# Altium PCB PCB1.PcbDoc (part 2 of 2)
Units mm, origin at the board's own origin, x right, y up, seen from the top; angles counter-clockwise.
Board outline 103.25 x 34.25 mm, 2 copper layers (Top Layer, Bottom Layer); 292 components, 18 nets, 632 pads, 262 vias.
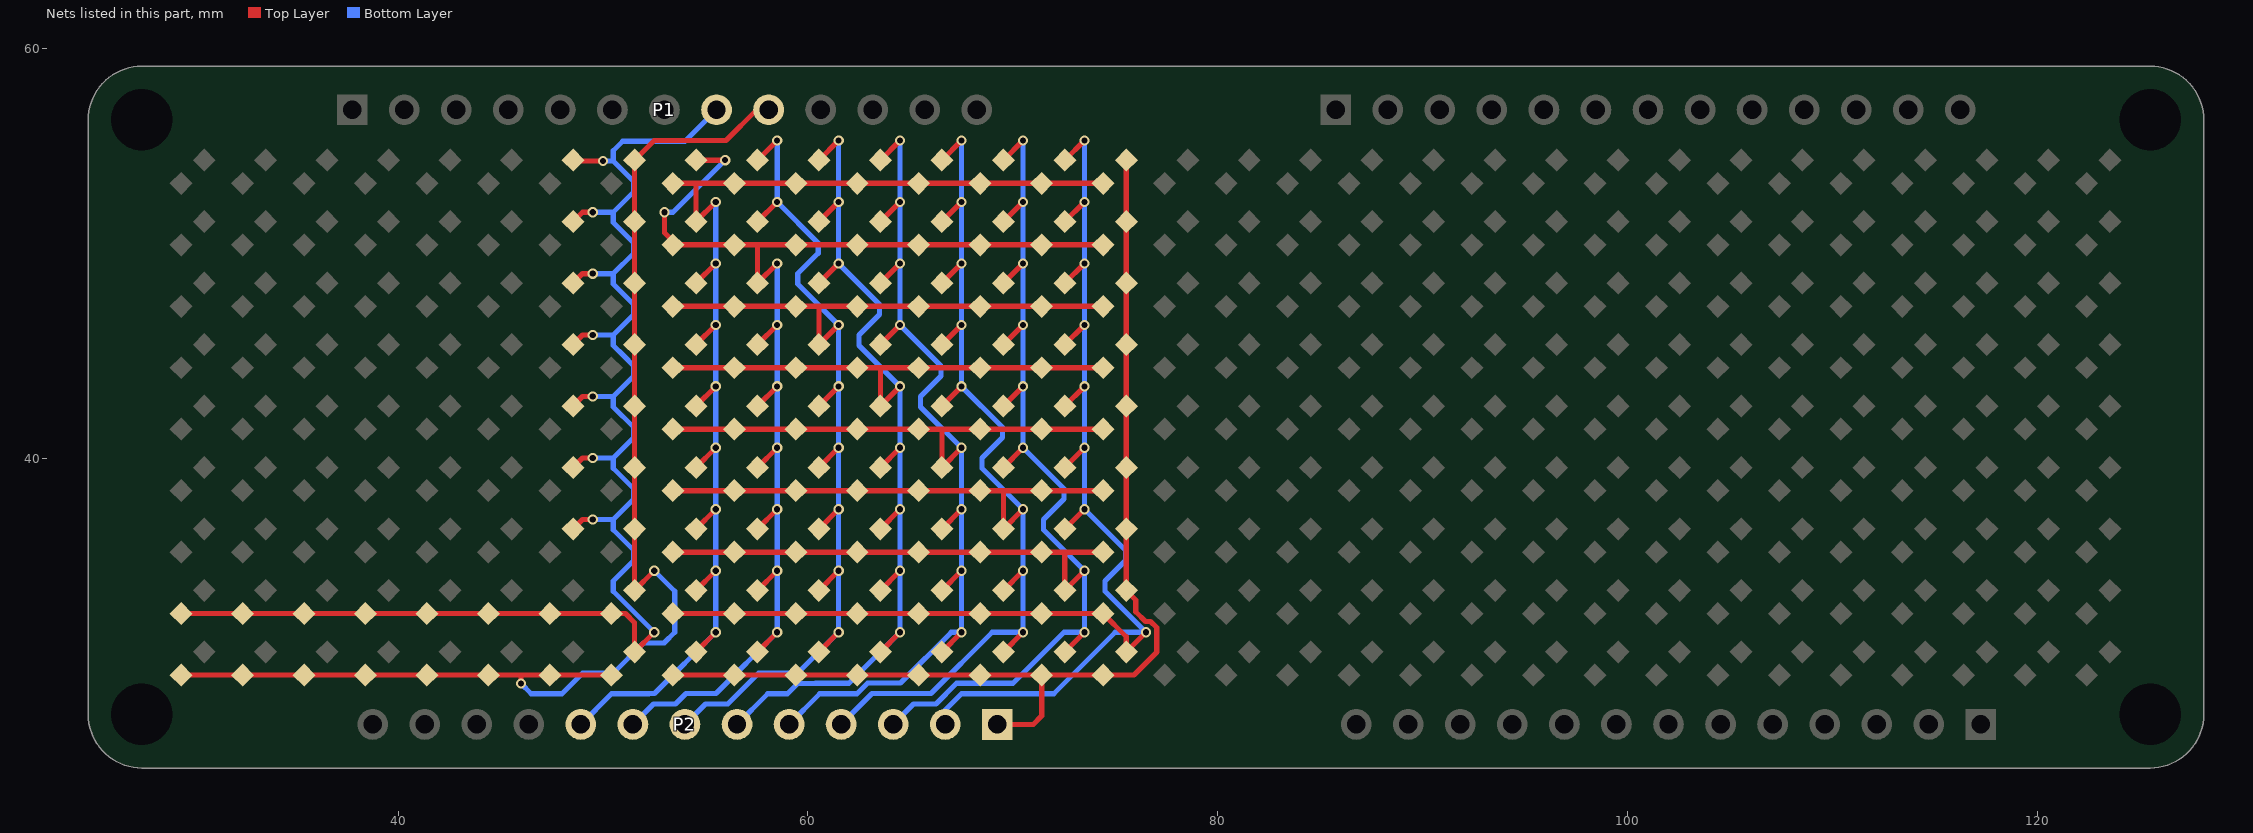
[diagram p2: the nets of this part, all layers, seen from the top]

## Via types
v1: diameter 0.5, hole 0.3, Top Layer to Bottom Layer, 262 vias

## Nets (pads, with @x,y where several pads share a name; then routed paths per layer and width w, separated by ;. In a path a pad name is that pad's centre, name@x,y a point inside that pad or via, vN(x,y) a via of type N, cw(c..) or ccw(c..) an arc to the next point about the centre after c; other vN are vias at no path point) (continued)
CA8: C1-7.1 C2-7.1 C3-7.1 C4-7.1 C5-7.1 C6-7.1 C7-7.1 C8-1.2 C8-2.2 C8-3.2 C8-4.2 C8-5.2 C8-6.2 C8-7.2 C8-8.2 C9-8.1 P1.8 | length 76
  Top Layer w0.254: C8-1.2@29.407,32.407 C8-2.2@32.407,32.407 C8-3.2@35.407,32.407 C8-4.2@38.407,32.407 C8-5.2@41.407,32.407 C8-6.2@44.407,32.407 C8-7.2@47.407,32.407 C8-8.2@50.407,32.407 51.093,32.407 51.539,31.961 C9-8.1@51.539,30.539 v1(52.5,31.5) ; C7-7.1@48.539,36.539 49,37 v1(49.5,37) ; C6-7.1@48.539,39.539 49,40 v1(49.5,40) ; C5-7.1@48.539,42.539 49,43 v1(49.5,43) ; C4-7.1@48.539,45.539 49,46 v1(49.5,46) ; C3-7.1@48.539,48.539 49,49 v1(49.5,49) ; C2-7.1@48.539,51.539 49,52 v1(49.5,52) ; C1-7.1@48.539,54.539 48.578,54.5 v1(50,54.5)
  Bottom Layer w0.254: v1(49.5,37) 50.5,37 ; v1(49.5,40) 50.5,40 ; v1(49.5,43) 50.5,43 ; v1(49.5,46) 50.5,46 ; v1(49.5,49) 50.5,49 ; v1(49.5,52) 50.5,52 ; v1(50,54.5) 50.5,54.5 ; v1(52.5,31.5) 50.5,33.5 50.5,34 51.5,35 51.5,35.5 50.5,36.5 50.5,37 ; P1.8@55.54,57 54.003,55.463 50.963,55.463 50.5,55 50.5,54.5 ; 50.5,37 51.5,38 51.5,38.5 50.5,39.5 50.5,40 ; 50.5,40 51.5,41 51.5,41.5 50.5,42.5 50.5,43 ; 50.5,43 51.5,44 51.5,44.5 51,45 50.5,45.5 50.5,46 ; 50.5,46 51.5,47 51.5,47.5 50.5,48.5 50.5,49 ; 50.5,49 51.5,50 51.5,50.5 50.5,51.5 50.5,52 ; 50.5,52 51.5,53 51.5,53.5 50.5,54.5
CA9: C1-8.1 C2-8.1 C3-8.1 C4-8.1 C5-8.1 C6-8.1 C7-8.1 C8-8.1 C9-1.2 C9-2.2 C9-3.2 C9-4.2 C9-5.2 C9-6.2 C9-7.2 C9-8.2 P1.9 | length 63.7
  Top Layer w0.254: C9-1.2@29.407,29.407 C9-2.2@32.407,29.407 C9-3.2@35.407,29.407 C9-4.2@38.407,29.407 C9-5.2@41.407,29.407 C9-6.2@44.407,29.407 46,29.407 ; v1(46,29) 46,29.407 ; C9-8.2@50.407,29.407 C9-7.2@47.407,29.407 46,29.407 ; v1(52.5,34.5) C8-8.1@51.539,33.539 C7-8.1@51.539,36.539 C6-8.1@51.539,39.539 C5-8.1@51.539,42.539 C4-8.1@51.539,45.539 C3-8.1@51.539,48.539 C2-8.1@51.539,51.539 C1-8.1@51.539,54.539 52.5,55.5 56,55.5 57.5,57 P1.9@58.08,57
  Bottom Layer w0.254: v1(46,29) 46.5,28.5 48,28.5 49,29.5 50.5,29.5 51.971,30.971 53,30.971 53,31 53.5,31.5 53.5,33.5 v1(52.5,34.5)
CB1: C1-9.2 C1-10.2 C1-11.2 C1-12.2 C1-13.2 C1-14.2 C1-15.2 C1-16.2 C2-9.1 C3-9.1 C4-9.1 C5-9.1 C6-9.1 C7-9.1 C8-9.1 C9-9.1 P2.9 | length 63.2
  Top Layer w0.254: C1-9.2@53.407,53.407 54.5,53.407 ; C9-9.1@54.539,30.539 v1(55.5,31.5) ; C8-9.1@54.539,33.539 v1(55.5,34.5) ; C7-9.1@54.539,36.539 v1(55.5,37.5) ; C6-9.1@54.539,39.539 v1(55.5,40.5) ; C5-9.1@54.539,42.539 v1(55.5,43.5) ; C4-9.1@54.539,45.539 v1(55.5,46.5) ; C3-9.1@54.539,48.539 v1(55.5,49.5) ; v1(55.5,52.5) C2-9.1@54.539,51.539 54.539,53.369 54.5,53.407 ; C1-16.2@74.407,53.407 C1-15.2@71.407,53.407 C1-14.2@68.407,53.407 C1-13.2@65.407,53.407 C1-12.2@62.407,53.407 C1-11.2@59.407,53.407 C1-10.2@56.407,53.407 54.5,53.407
  Bottom Layer w0.254: P2.9@48.92,27 50.42,28.5 52.242,28.5 52.25,28.508 52.508,28.508 v1(55.5,31.5) v1(55.5,34.5) v1(55.5,37.5) v1(55.5,40.5) v1(55.5,43.5) v1(55.5,46.5) v1(55.5,49.5) v1(55.5,52.5)
CB2: C1-9.1 C2-9.2 C2-10.2 C2-11.2 C2-12.2 C2-13.2 C2-14.2 C2-15.2 C2-16.2 C3-10.1 C4-10.1 C5-10.1 C6-10.1 C7-10.1 C8-10.1 C9-10.1 P2.8 | length 66.5
  Top Layer w0.254: v1(53,52) 53,51 53.407,50.593 C2-9.2@53.407,50.407 C2-10.2@56.407,50.407 57.5,50.407 ; C1-9.1@54.539,54.539 v1(55.961,54.539) ; C9-10.1@57.539,30.539 v1(58.5,31.5) ; C8-10.1@57.539,33.539 v1(58.5,34.5) ; C7-10.1@57.539,36.539 v1(58.5,37.5) ; C6-10.1@57.539,39.539 v1(58.5,40.5) ; C5-10.1@57.539,42.539 v1(58.5,43.5) ; C4-10.1@57.539,45.539 v1(58.5,46.5) ; v1(58.5,49.5) C3-10.1@57.539,48.539 57.539,50.369 57.5,50.407 ; C2-16.2@74.407,50.407 C2-15.2@71.407,50.407 C2-14.2@68.407,50.407 C2-13.2@65.407,50.407 C2-12.2@62.407,50.407 C2-11.2@59.407,50.407 57.5,50.407
  Bottom Layer w0.254: P2.8@51.46,27 52.46,28 53.545,28 54.053,28.508 55.508,28.508 v1(58.5,31.5) v1(58.5,34.5) v1(58.5,37.5) v1(58.5,40.5) v1(58.5,43.5) v1(58.5,46.5) v1(58.5,49.5) ; v1(53,52) 53.422,52 v1(55.961,54.539)
CB3: C1-10.1 C2-10.1 C3-9.2 C3-10.2 C3-11.2 C3-12.2 C3-13.2 C3-14.2 C3-15.2 C3-16.2 C4-11.1 C5-11.1 C6-11.1 C7-11.1 C8-11.1 C9-11.1 P2.7 | length 69.2
  Top Layer w0.254: C3-9.2@53.407,47.407 C3-10.2@56.407,47.407 C3-11.2@59.407,47.407 60.5,47.407 ; C2-10.1@57.539,51.539 v1(58.5,52.5) ; C1-10.1@57.539,54.539 v1(58.5,55.5) ; C9-11.1@60.539,30.539 v1(61.5,31.5) ; C8-11.1@60.539,33.539 v1(61.5,34.5) ; C7-11.1@60.539,36.539 v1(61.5,37.5) ; C6-11.1@60.539,39.539 v1(61.5,40.5) ; C5-11.1@60.539,42.539 v1(61.5,43.5) ; v1(61.5,46.5) C4-11.1@60.539,45.539 60.539,47.369 60.5,47.407 ; C3-16.2@74.407,47.407 C3-15.2@71.407,47.407 C3-14.2@68.407,47.407 C3-13.2@65.407,47.407 C3-12.2@62.407,47.407 60.5,47.407
  Bottom Layer w0.254: P2.7@54,27 55,28 56.085,28 57.585,29.5 59.282,29.5 59.29,29.508 59.508,29.508 v1(61.5,31.5) v1(61.5,34.5) v1(61.5,37.5) v1(61.5,40.5) v1(61.5,43.5) v1(61.5,46.5) 59.5,48.5 59.5,49 60.5,50 60.5,50.5 v1(58.5,52.5) v1(58.5,55.5)
CB4: C1-11.1 C2-11.1 C3-11.1 C4-9.2 C4-10.2 C4-11.2 C4-12.2 C4-13.2 C4-14.2 C4-15.2 C4-16.2 C5-12.1 C6-12.1 C7-12.1 C8-12.1 C9-12.1 P2.6 | length 69.7
  Top Layer w0.254: C4-9.2@53.407,44.407 C4-10.2@56.407,44.407 C4-11.2@59.407,44.407 C4-12.2@62.407,44.407 63.5,44.407 ; C3-11.1@60.539,48.539 v1(61.5,49.5) ; C2-11.1@60.539,51.539 v1(61.5,52.5) ; C1-11.1@60.539,54.539 v1(61.5,55.5) ; C9-12.1@63.539,30.539 v1(64.5,31.5) ; C8-12.1@63.539,33.539 v1(64.5,34.5) ; C7-12.1@63.539,36.539 v1(64.5,37.5) ; C6-12.1@63.539,39.539 v1(64.5,40.5) ; v1(64.5,43.5) C5-12.1@63.539,42.539 63.539,44.369 63.5,44.407 ; C4-16.2@74.407,44.407 C4-15.2@71.407,44.407 C4-14.2@68.407,44.407 C4-13.2@65.407,44.407 63.5,44.407
  Bottom Layer w0.254: P2.6@56.54,27 58.04,28.5 59,28.5 59.5,29 60.362,29 60.37,29.008 62.008,29.008 v1(64.5,31.5) v1(64.5,34.5) v1(64.5,37.5) v1(64.5,40.5) v1(64.5,43.5) 62.5,45.5 62.5,46 63.5,47 63.5,47.5 v1(61.5,49.5) v1(61.5,52.5) v1(61.5,55.5)
CB5: C1-12.1 C2-12.1 C3-12.1 C4-12.1 C5-9.2 C5-10.2 C5-11.2 C5-12.2 C5-13.2 C5-14.2 C5-15.2 C5-16.2 C6-13.1 C7-13.1 C8-13.1 C9-13.1 P2.5 | length 70.1
  Top Layer w0.254: C5-9.2@53.407,41.407 C5-10.2@56.407,41.407 C5-11.2@59.407,41.407 C5-12.2@62.407,41.407 C5-13.2@65.407,41.407 66.5,41.407 ; C4-12.1@63.539,45.539 v1(64.5,46.5) ; C3-12.1@63.539,48.539 v1(64.5,49.5) ; C2-12.1@63.539,51.539 v1(64.5,52.5) ; C1-12.1@63.539,54.539 v1(64.5,55.5) ; C9-13.1@66.539,30.539 v1(67.5,31.5) ; C8-13.1@66.539,33.539 v1(67.5,34.5) ; C7-13.1@66.539,36.539 v1(67.5,37.5) ; v1(67.5,40.5) C6-13.1@66.539,39.539 66.539,41.369 66.5,41.407 ; C5-16.2@74.407,41.407 C5-15.2@71.407,41.407 C5-14.2@68.407,41.407 66.5,41.407
  Bottom Layer w0.254: P2.5@59.08,27 60.58,28.5 62.402,28.5 62.918,29.016 64.516,29.016 67,31.5 v1(67.5,31.5) v1(67.5,34.5) v1(67.5,37.5) v1(67.5,40.5) 65.5,42.5 65.5,43 66.5,44 66.5,44.5 v1(64.5,46.5) v1(64.5,49.5) v1(64.5,52.5) v1(64.5,55.5)
CB6: C1-13.1 C2-13.1 C3-13.1 C4-13.1 C5-13.1 C6-9.2 C6-10.2 C6-11.2 C6-12.2 C6-13.2 C6-14.2 C6-15.2 C6-16.2 C7-14.1 C8-14.1 C9-14.1 P2.4 | length 70.6
  Top Layer w0.254: C6-9.2@53.407,38.407 C6-10.2@56.407,38.407 C6-11.2@59.407,38.407 C6-12.2@62.407,38.407 C6-13.2@65.407,38.407 C6-14.2@68.407,38.407 69.5,38.407 ; C5-13.1@66.539,42.539 v1(67.5,43.5) ; C4-13.1@66.539,45.539 v1(67.5,46.5) ; C3-13.1@66.539,48.539 v1(67.5,49.5) ; C2-13.1@66.539,51.539 v1(67.5,52.5) ; C1-13.1@66.539,54.539 v1(67.5,55.5) ; C9-14.1@69.539,30.539 v1(70.5,31.5) ; C8-14.1@69.539,33.539 v1(70.5,34.5) ; v1(70.5,37.5) C7-14.1@69.539,36.539 69.539,38.369 69.5,38.407 ; C6-16.2@74.407,38.407 C6-15.2@71.407,38.407 69.5,38.407
  Bottom Layer w0.254: P2.4@61.62,27 63.128,28.508 66.008,28.508 69,31.5 v1(70.5,31.5) v1(70.5,34.5) v1(70.5,37.5) 68.5,39.5 68.5,40 69.5,41 69.5,41.5 v1(67.5,43.5) v1(67.5,46.5) v1(67.5,49.5) v1(67.5,52.5) v1(67.5,55.5)
CB7: C1-14.1 C2-14.1 C3-14.1 C4-14.1 C5-14.1 C6-14.1 C7-9.2 C7-10.2 C7-11.2 C7-12.2 C7-13.2 C7-14.2 C7-15.2 C7-16.2 C8-15.1 C9-15.1 P2.3 | length 71
  Top Layer w0.254: C7-9.2@53.407,35.407 C7-10.2@56.407,35.407 C7-11.2@59.407,35.407 C7-12.2@62.407,35.407 C7-13.2@65.407,35.407 C7-14.2@68.407,35.407 C7-15.2@71.407,35.407 72.5,35.407 ; C6-14.1@69.539,39.539 v1(70.5,40.5) ; C5-14.1@69.539,42.539 v1(70.5,43.5) ; C4-14.1@69.539,45.539 v1(70.5,46.5) ; C3-14.1@69.539,48.539 v1(70.5,49.5) ; C2-14.1@69.539,51.539 v1(70.5,52.5) ; C1-14.1@69.539,54.539 v1(70.5,55.5) ; C9-15.1@72.539,30.539 v1(73.5,31.5) ; v1(73.5,34.5) C8-15.1@72.539,33.539 72.539,35.369 72.5,35.407 ; C7-16.2@74.407,35.407 72.5,35.407
  Bottom Layer w0.254: P2.3@64.16,27 65.16,28 66.245,28 67.253,29.008 70.008,29.008 72.5,31.5 v1(73.5,31.5) v1(73.5,34.5) 71.5,36.5 71.5,37 72.5,38 72.5,38.5 v1(70.5,40.5) v1(70.5,43.5) v1(70.5,46.5) v1(70.5,49.5) v1(70.5,52.5) v1(70.5,55.5)
CB8: C1-15.1 C2-15.1 C3-15.1 C4-15.1 C5-15.1 C6-15.1 C7-15.1 C8-9.2 C8-10.2 C8-11.2 C8-12.2 C8-13.2 C8-14.2 C8-15.2 C8-16.2 C9-16.1 P2.2 | length 72.4
  Top Layer w0.254: C8-9.2@53.407,32.407 C8-10.2@56.407,32.407 C8-11.2@59.407,32.407 C8-12.2@62.407,32.407 C8-13.2@65.407,32.407 C8-14.2@68.407,32.407 C8-15.2@71.407,32.407 C8-16.2@74.407,32.407 75.539,31.276 C9-16.1@75.539,30.539 v1(76.5,31.5) ; C7-15.1@72.539,36.539 v1(73.5,37.5) ; C6-15.1@72.539,39.539 v1(73.5,40.5) ; C5-15.1@72.539,42.539 v1(73.5,43.5) ; C4-15.1@72.539,45.539 v1(73.5,46.5) ; C3-15.1@72.539,48.539 v1(73.5,49.5) ; C2-15.1@72.539,51.539 v1(73.5,52.5) ; C1-15.1@72.539,54.539 v1(73.5,55.5)
  Bottom Layer w0.254: P2.2@66.7,27 66.7,27.7 67.5,28.5 72,28.5 75,31.5 v1(76.5,31.5) 74.5,33.5 74.5,34 75.5,35 75.5,35.5 v1(73.5,37.5) v1(73.5,40.5) v1(73.5,43.5) v1(73.5,46.5) v1(73.5,49.5) v1(73.5,52.5) v1(73.5,55.5)
CB9: C1-16.1 C2-16.1 C3-16.1 C4-16.1 C5-16.1 C6-16.1 C7-16.1 C8-16.1 C9-9.2 C9-10.2 C9-11.2 C9-12.2 C9-13.2 C9-14.2 C9-15.2 C9-16.2 P2.1 | length 53.2
  Top Layer w0.254: C9-9.2@53.407,29.407 C9-10.2@56.407,29.407 C9-11.2@59.407,29.407 C9-12.2@62.407,29.407 C9-13.2@65.407,29.407 C9-14.2@68.407,29.407 C9-15.2@71.407,29.407 ; P2.1@69.24,27 71,27 71.407,27.407 C9-15.2@71.407,29.407 ; C1-16.1@75.539,54.539 C3-16.1@75.539,48.539 C4-16.1@75.539,45.539 C5-16.1@75.539,42.539 C6-16.1@75.539,39.539 C7-16.1@75.539,36.539 C8-16.1@75.539,33.539 76,33.078 76,32.5 76.471,32.029 76.719,32.029 77.029,31.719 77.029,30.529 75.907,29.407 C9-16.2@74.407,29.407 C9-15.2@71.407,29.407
pads on no net: C1-1_1.1 C1-1_1.2 C1-2_1.1 C1-2_1.2 C1-3_1.1 C1-3_1.2 C1-4_1.1 C1-4_1.2 C1-5_1.1 C1-5_1.2 C1-6_1.1 C1-6_1.2 C1-7_1.1 C1-7_1.2 C1-8_1.1 C1-8_1.2 C1-9_1.1 C1-9_1.2 C1-10_1.1 C1-10_1.2 C1-11_1.1 C1-11_1.2 C1-12_1.1 C1-12_1.2 C1-13_1.1 C1-13_1.2 C1-14_1.1 C1-14_1.2 C1-15_1.1 C1-15_1.2 C1-16_1.1 C1-16_1.2 C2-1_1.1 C2-1_1.2 C2-2_1.1 C2-2_1.2 C2-3_1.1 C2-3_1.2 C2-4_1.1 C2-4_1.2 C2-5_1.1 C2-5_1.2 C2-6_1.1 C2-6_1.2 C2-7_1.1 C2-7_1.2 C2-8_1.1 C2-8_1.2 C2-9_1.1 C2-9_1.2 C2-10_1.1 C2-10_1.2 C2-11_1.1 C2-11_1.2 C2-12_1.1 C2-12_1.2 C2-13_1.1 C2-13_1.2 C2-14_1.1 C2-14_1.2 C2-15_1.1 C2-15_1.2 C2-16_1.1 C2-16_1.2 C3-1_1.1 C3-1_1.2 C3-2_1.1 C3-2_1.2 C3-3_1.1 C3-3_1.2 C3-4_1.1 C3-4_1.2 C3-5_1.1 C3-5_1.2 C3-6_1.1 C3-6_1.2 C3-7_1.1 C3-7_1.2 C3-8_1.1 C3-8_1.2 C3-9_1.1 C3-9_1.2 C3-10_1.1 C3-10_1.2 C3-11_1.1 C3-11_1.2 C3-12_1.1 C3-12_1.2 C3-13_1.1 C3-13_1.2 C3-14_1.1 C3-14_1.2 C3-15_1.1 C3-15_1.2 C3-16_1.1 C3-16_1.2 C4-1_1.1 C4-1_1.2 C4-2_1.1 C4-2_1.2 C4-3_1.1 C4-3_1.2 C4-4_1.1 C4-4_1.2 C4-5_1.1 C4-5_1.2 C4-6_1.1 C4-6_1.2 C4-7_1.1 C4-7_1.2 C4-8_1.1 C4-8_1.2 C4-9_1.1 C4-9_1.2 C4-10_1.1 C4-10_1.2 C4-11_1.1 C4-11_1.2 C4-12_1.1 C4-12_1.2 C4-13_1.1 C4-13_1.2 C4-14_1.1 C4-14_1.2 C4-15_1.1 C4-15_1.2 C4-16_1.1 C4-16_1.2 C5-1_1.1 C5-1_1.2 C5-2_1.1 C5-2_1.2 C5-3_1.1 C5-3_1.2 C5-4_1.1 C5-4_1.2 C5-5_1.1 C5-5_1.2 C5-6_1.1 C5-6_1.2 C5-7_1.1 C5-7_1.2 C5-8_1.1 C5-8_1.2 C5-9_1.1 C5-9_1.2 C5-10_1.1 C5-10_1.2 C5-11_1.1 C5-11_1.2 C5-12_1.1 C5-12_1.2 C5-13_1.1 C5-13_1.2 C5-14_1.1 C5-14_1.2 C5-15_1.1 C5-15_1.2 C5-16_1.1 C5-16_1.2 C6-1_1.1 C6-1_1.2 C6-2_1.1 C6-2_1.2 C6-3_1.1 C6-3_1.2 C6-4_1.1 C6-4_1.2 C6-5_1.1 C6-5_1.2 C6-6_1.1 C6-6_1.2 C6-7_1.1 C6-7_1.2 C6-8_1.1 C6-8_1.2 C6-9_1.1 C6-9_1.2 C6-10_1.1 C6-10_1.2 C6-11_1.1 C6-11_1.2 C6-12_1.1 C6-12_1.2 C6-13_1.1 C6-13_1.2 C6-14_1.1 C6-14_1.2 C6-15_1.1 C6-15_1.2 C6-16_1.1 C6-16_1.2 C7-1_1.1 C7-1_1.2 C7-2_1.1 C7-2_1.2 C7-3_1.1 C7-3_1.2 C7-4_1.1 C7-4_1.2 C7-5_1.1 C7-5_1.2 C7-6_1.1 C7-6_1.2 C7-7_1.1 C7-7_1.2 C7-8_1.1 C7-8_1.2 C7-9_1.1 C7-9_1.2 C7-10_1.1 C7-10_1.2 C7-11_1.1 C7-11_1.2 C7-12_1.1 C7-12_1.2 C7-13_1.1 C7-13_1.2 C7-14_1.1 C7-14_1.2 C7-15_1.1 C7-15_1.2 C7-16_1.1 C7-16_1.2 C8-1_1.1 C8-1_1.2 C8-2_1.1 C8-2_1.2 C8-3_1.1 C8-3_1.2 C8-4_1.1 C8-4_1.2 C8-5_1.1 C8-5_1.2 C8-6_1.1 C8-6_1.2 C8-7_1.1 C8-7_1.2 C8-8_1.1 C8-8_1.2 C8-9_1.1 C8-9_1.2 C8-10_1.1 C8-10_1.2 C8-11_1.1 C8-11_1.2 C8-12_1.1 C8-12_1.2 C8-13_1.1 C8-13_1.2 C8-14_1.1 C8-14_1.2 C8-15_1.1 C8-15_1.2 C8-16_1.1 C8-16_1.2 C9-1_1.1 C9-1_1.2 C9-2_1.1 C9-2_1.2 C9-3_1.1 C9-3_1.2 C9-4_1.1 C9-4_1.2 C9-5_1.1 C9-5_1.2 C9-6_1.1 C9-6_1.2 C9-7_1.1 C9-7_1.2 C9-8_1.1 C9-8_1.2 C9-9_1.1 C9-9_1.2 C9-10_1.1 C9-10_1.2 C9-11_1.1 C9-11_1.2 C9-12_1.1 C9-12_1.2 C9-13_1.1 C9-13_1.2 C9-14_1.1 C9-14_1.2 C9-15_1.1 C9-15_1.2 C9-16_1.1 C9-16_1.2 P1.10 P1.11 P1.12 P1.13 P1_1.1 P1_1.2 P1_1.3 P1_1.4 P1_1.5 P1_1.6 P1_1.7 P1_1.8 P1_1.9 P1_1.10 P1_1.11 P1_1.12 P1_1.13 P2.10 P2.11 P2.12 P2.13 P2_1.1 P2_1.2 P2_1.3 P2_1.4 P2_1.5 P2_1.6 P2_1.7 P2_1.8 P2_1.9 P2_1.10 P2_1.11 P2_1.12 P2_1.13
copper on no net: | length 1239
  Top Layer w0.254: 77.407,29.407 80.407,29.407 83.407,29.407 86.407,29.407 89.407,29.407 92.407,29.407 94,29.407 ; 77.407,32.407 80.407,32.407 83.407,32.407 86.407,32.407 89.407,32.407 92.407,32.407 95.407,32.407 98.407,32.407 99.093,32.407 99.539,31.961 99.539,30.539 v1(100.5,31.5) ; 77.407,35.407 80.407,35.407 83.407,35.407 86.407,35.407 89.407,35.407 92.407,35.407 95.407,35.407 96.5,35.407 ; 77.407,38.407 80.407,38.407 83.407,38.407 86.407,38.407 89.407,38.407 92.407,38.407 93.5,38.407 ; 77.407,41.407 80.407,41.407 83.407,41.407 86.407,41.407 89.407,41.407 90.5,41.407 ; 77.407,44.407 80.407,44.407 83.407,44.407 86.407,44.407 87.5,44.407 ; 77.407,47.407 80.407,47.407 83.407,47.407 84.5,47.407 ; 77.407,50.407 80.407,50.407 81.5,50.407 ; 77.407,53.407 78.5,53.407 ; 78.539,30.539 v1(79.5,31.5) ; 78.539,33.539 v1(79.5,34.5) ; 78.539,36.539 v1(79.5,37.5) ; 78.539,39.539 v1(79.5,40.5) ; 78.539,42.539 v1(79.5,43.5) ; 78.539,45.539 v1(79.5,46.5) ; 78.539,48.539 v1(79.5,49.5) ; 78.539,54.539 80,56 v1(82,56) ; v1(79.5,52.5) 78.539,51.539 78.539,53.369 78.5,53.407 ; 81.539,30.539 v1(82.5,31.5) ; 81.539,33.539 v1(82.5,34.5) ; 81.539,36.539 v1(82.5,37.5) ; 81.539,39.539 v1(82.5,40.5) ; 81.539,42.539 v1(82.5,43.5) ; 81.539,45.539 v1(82.5,46.5) ; 81.539,51.539 82,52 v1(82.5,52) ; 81.539,54.539 82,55 v1(82.5,55) ; v1(82.5,49.5) 81.539,48.539 81.5,48.578 81.5,50.407 ; 84.539,30.539 v1(85.5,31.5) ; 84.539,33.539 v1(85.5,34.5) ; 84.539,36.539 v1(85.5,37.5) ; 84.539,39.539 v1(85.5,40.5) ; 84.539,42.539 v1(85.5,43.5) ; 84.539,48.539 85,49 v1(85.5,49) ; 84.539,51.539 85,52 v1(85.5,52) ; 84.539,54.539 84.578,54.5 v1(86.125,54.5) ; v1(85.5,46.5) 84.539,45.539 84.539,47.369 84.5,47.407 ; 87.539,30.539 v1(88.5,31.5) ; 87.539,33.539 v1(88.5,34.5) ; 87.539,36.539 v1(88.5,37.5) ; 87.539,39.539 v1(88.5,40.5) ; 87.539,45.539 88.039,45.539 v1(88.5,46) ; 87.539,48.539 88,49 v1(88.5,49) ; 87.539,51.539 88.039,51.539 v1(88.5,52) ; 87.539,54.539 87.578,54.5 v1(89,54.5) ; v1(88.5,43.5) 87.539,42.539 87.539,44.369 87.5,44.407 ; 90.539,30.539 v1(91.5,31.5) ; 90.539,33.539 v1(91.5,34.5) ; 90.539,36.539 v1(91.5,37.5) ; 90.539,42.539 91,43 v1(91.5,43) ; 90.539,45.539 91,46 v1(91.5,46) ; 90.539,48.539 91,49 v1(91.5,49) ; 90.539,51.539 91,52 v1(91.5,52) ; 90.539,54.539 90.578,54.5 v1(92,54.5) ; v1(91.5,40.5) 90.539,39.539 90.539,41.369 90.5,41.407 ; 93.539,30.539 v1(94.5,31.5) ; 93.539,33.539 v1(94.5,34.5) ; 93.539,39.539 94,40 v1(94.5,40) ; 93.539,42.539 94,43 v1(94.5,43) ; 93.539,45.539 94,46 v1(94.5,46) ; 93.539,48.539 94,49 v1(94.5,49) ; 93.539,51.539 94,52 v1(94.5,52) ; 93.539,54.539 93.578,54.5 v1(95,54.5) ; v1(94,29) 94,29.407 ; v1(94.5,37.5) 93.539,36.539 93.539,38.369 93.5,38.407 ; 96.539,30.539 v1(97.5,31.5) ; 96.539,36.539 97,37 v1(97.5,37) ; 96.539,39.539 97,40 v1(97.5,40) ; 96.539,42.539 97,43 v1(97.5,43) ; 96.539,45.539 97,46 v1(97.5,46) ; 96.539,48.539 97,49 v1(97.5,49) ; 96.539,51.539 97,52 v1(97.5,52) ; 96.539,54.539 96.578,54.5 v1(98,54.5) ; v1(97.5,34.5) 96.539,33.539 96.539,35.369 96.5,35.407 ; 98.407,29.407 95.407,29.407 94,29.407 ; 98.407,35.407 96.5,35.407 ; 98.407,38.407 95.407,38.407 93.5,38.407 ; 98.407,41.407 95.407,41.407 92.407,41.407 90.5,41.407 ; 98.407,44.407 95.407,44.407 92.407,44.407 89.407,44.407 87.5,44.407 ; 98.407,47.407 95.407,47.407 92.407,47.407 89.407,47.407 86.407,47.407 84.5,47.407 ; 98.407,53.407 95.407,53.407 92.407,53.407 89.407,53.407 86.407,53.407 83.407,53.407 80.407,53.407 78.5,53.407 ; 98.5,50.5 98.407,50.407 95.407,50.407 92.407,50.407 89.407,50.407 86.407,50.407 83.407,50.407 81.5,50.407 ; v1(100.5,34.5) 99.539,33.539 99.539,36.539 99.539,39.539 99.539,42.539 99.539,45.539 99.539,48.539 99.539,51.539 99.539,54.539 100.5,55.5 104,55.5 105.5,57 106.08,57 ; v1(101,52) 101,51 101.407,50.593 101.407,50.407 104.407,50.407 105.5,50.407 ; 101.407,29.407 104.407,29.407 107.407,29.407 110.407,29.407 113.407,29.407 116.407,29.407 119.407,29.407 ; 101.407,32.407 104.407,32.407 107.407,32.407 110.407,32.407 113.407,32.407 116.407,32.407 119.407,32.407 122.407,32.407 123.539,31.276 123.539,30.539 v1(124.5,31.5) ; 101.407,35.407 104.407,35.407 107.407,35.407 110.407,35.407 113.407,35.407 116.407,35.407 119.407,35.407 120.5,35.407 ; 101.407,38.407 104.407,38.407 107.407,38.407 110.407,38.407 113.407,38.407 116.407,38.407 117.5,38.407 ; 101.407,41.407 104.407,41.407 107.407,41.407 110.407,41.407 113.407,41.407 114.5,41.407 ; 101.407,44.407 104.407,44.407 107.407,44.407 110.407,44.407 111.5,44.407 ; 101.407,47.407 104.407,47.407 107.407,47.407 108.5,47.407 ; 101.407,53.407 102.5,53.407 ; 102.539,30.539 v1(103.5,31.5) ; 102.539,33.539 v1(103.5,34.5) ; 102.539,36.539 v1(103.5,37.5) ; 102.539,39.539 v1(103.5,40.5) ; 102.539,42.539 v1(103.5,43.5) ; 102.539,45.539 v1(103.5,46.5) ; 102.539,48.539 v1(103.5,49.5) ; 102.539,54.539 v1(103.961,54.539) ; v1(103.5,52.5) 102.539,51.539 102.539,53.369 102.5,53.407 ; 105.539,30.539 v1(106.5,31.5) ; 105.539,33.539 v1(106.5,34.5) ; 105.539,36.539 v1(106.5,37.5) ; 105.539,39.539 v1(106.5,40.5) ; 105.539,42.539 v1(106.5,43.5) ; 105.539,45.539 v1(106.5,46.5) ; 105.539,51.539 v1(106.5,52.5) ; 105.539,54.539 v1(106.5,55.5) ; v1(106.5,49.5) 105.539,48.539 105.539,50.369 105.5,50.407 ; 108.539,30.539 v1(109.5,31.5) ; 108.539,33.539 v1(109.5,34.5) ; 108.539,36.539 v1(109.5,37.5) ; 108.539,39.539 v1(109.5,40.5) ; 108.539,42.539 v1(109.5,43.5) ; 108.539,48.539 v1(109.5,49.5) ; 108.539,51.539 v1(109.5,52.5) ; 108.539,54.539 v1(109.5,55.5) ; v1(109.5,46.5) 108.539,45.539 108.539,47.369 108.5,47.407 ; 111.539,30.539 v1(112.5,31.5) ; 111.539,33.539 v1(112.5,34.5) ; 111.539,36.539 v1(112.5,37.5) ; 111.539,39.539 v1(112.5,40.5) ; 111.539,45.539 v1(112.5,46.5) ; 111.539,48.539 v1(112.5,49.5) ; 111.539,51.539 v1(112.5,52.5) ; 111.539,54.539 v1(112.5,55.5) ; v1(112.5,43.5) 111.539,42.539 111.539,44.369 111.5,44.407 ; 114.539,30.539 v1(115.5,31.5) ; 114.539,33.539 v1(115.5,34.5) ; 114.539,36.539 v1(115.5,37.5) ; 114.539,42.539 v1(115.5,43.5) ; 114.539,45.539 v1(115.5,46.5) ; 114.539,48.539 v1(115.5,49.5) ; 114.539,51.539 v1(115.5,52.5) ; 114.539,54.539 v1(115.5,55.5) ; v1(115.5,40.5) 114.539,39.539 114.539,41.369 114.5,41.407 ; 117.24,27 119,27 119.407,27.407 119.407,29.407 ; 117.539,30.539 v1(118.5,31.5) ; 117.539,33.539 v1(118.5,34.5) ; 117.539,39.539 v1(118.5,40.5) ; 117.539,42.539 v1(118.5,43.5) ; 117.539,45.539 v1(118.5,46.5) ; 117.539,48.539 v1(118.5,49.5) ; 117.539,51.539 v1(118.5,52.5) ; 117.539,54.539 v1(118.5,55.5) ; v1(118.5,37.5) 117.539,36.539 117.539,38.369 117.5,38.407 ; 120.539,30.539 v1(121.5,31.5) ; 120.539,36.539 v1(121.5,37.5) ; 120.539,39.539 v1(121.5,40.5) ; 120.539,42.539 v1(121.5,43.5) ; 120.539,45.539 v1(121.5,46.5) ; 120.539,48.539 v1(121.5,49.5) ; 120.539,51.539 v1(121.5,52.5) ; 120.539,54.539 v1(121.5,55.5) ; v1(121.5,34.5) 120.539,33.539 120.539,35.369 120.5,35.407 ; 122.407,35.407 120.5,35.407 ; 122.407,38.407 119.407,38.407 117.5,38.407 ; 122.407,41.407 119.407,41.407 116.407,41.407 114.5,41.407 ; 122.407,44.407 119.407,44.407 116.407,44.407 113.407,44.407 111.5,44.407 ; 122.407,47.407 119.407,47.407 116.407,47.407 113.407,47.407 110.407,47.407 108.5,47.407 ; 122.407,50.407 119.407,50.407 116.407,50.407 113.407,50.407 110.407,50.407 107.407,50.407 105.5,50.407 ; 122.407,53.407 119.407,53.407 116.407,53.407 113.407,53.407 110.407,53.407 107.407,53.407 104.407,53.407 102.5,53.407 ; 123.539,54.539 123.539,48.539 123.539,45.539 123.539,42.539 123.539,39.539 123.539,36.539 123.539,33.539 124,33.078 124,32.5 124.471,32.029 124.719,32.029 125.029,31.719 125.029,30.529 123.907,29.407 122.407,29.407 119.407,29.407
  Bottom Layer w0.254: v1(79.5,31.5) v1(79.5,34.5) v1(79.5,37.5) v1(79.5,40.5) v1(79.5,43.5) v1(79.5,46.5) v1(79.5,49.5) v1(79.5,52.5) 79.5,55 81.5,57 85.76,57 ; v1(82.5,31.5) v1(82.5,34.5) v1(82.5,37.5) v1(82.5,40.5) v1(82.5,43.5) v1(82.5,46.5) v1(82.5,49.5) 80.5,51.5 80.5,52 81.5,53 81.5,53.5 80.5,54.5 80.5,55.282 81.189,55.971 87.271,55.971 88.3,57 ; v1(82.5,52) 83.5,52 ; v1(82.5,55) 82.85,55 83.1,55.25 ; v1(85.5,31.5) v1(85.5,34.5) v1(85.5,37.5) v1(85.5,40.5) v1(85.5,43.5) v1(85.5,46.5) 83.5,48.5 83.5,49 84.5,50 84.5,50.5 83.5,51.5 83.5,52 ; v1(85.5,49) 86.5,49 ; v1(85.5,52) 86.5,52 ; v1(86.125,54.5) 86.35,54.725 ; v1(88.5,31.5) v1(88.5,34.5) v1(88.5,37.5) v1(88.5,40.5) v1(88.5,43.5) 86.5,45.5 86.5,46 87.5,47 87.5,47.5 86.5,48.5 86.5,49 ; v1(88.5,46) 89.5,46 ; v1(88.5,49) 89.5,49 ; v1(88.5,52) 89.5,52 ; v1(89,54.5) 89.5,54.5 ; 90.84,57 89.715,55.875 87.893,55.875 87.481,55.463 83.313,55.463 83.1,55.25 ; v1(91.5,31.5) v1(91.5,34.5) v1(91.5,37.5) v1(91.5,40.5) 89.5,42.5 89.5,43 90.5,44 90.5,44.5 89.5,45.5 89.5,46 ; v1(91.5,43) 92.5,43 ; v1(91.5,46) 92.5,46 ; v1(91.5,49) 92.5,49 ; v1(91.5,52) 92.5,52 ; v1(92,54.5) 92.04,54.46 92.46,54.46 93.421,53.5 93.421,53.079 92.5,52.158 92.5,52 ; 92.21,54.71 92.21,54.992 93.71,54.992 94.718,56 95.465,56 95.494,55.971 97.431,55.971 98.46,57 ; 93.38,57 92.5,57 90.867,55.367 88.367,55.367 87.955,54.955 86.58,54.955 86.35,54.725 ; v1(94,29) 94.5,28.5 96,28.5 97,29.5 98.5,29.5 99.971,30.971 101,30.971 101,31 101.5,31.5 101.5,33.5 v1(100.5,34.5) ; v1(94.5,31.5) v1(94.5,34.5) v1(94.5,37.5) 92.5,39.5 92.5,40 93.5,41 93.5,41.5 92.5,42.5 92.5,43 ; v1(94.5,40) 95.5,40 ; v1(94.5,43) 95.5,43 ; v1(94.5,46) 95.5,46 ; v1(94.5,49) 95.5,49 ; v1(94.5,52) 95.5,52 ; v1(95,54.5) 95.5,54.5 ; 95.92,57 95,57 93.5,55.5 92,55.5 91.25,54.75 90,54.75 89.891,54.859 89.609,54.859 89.5,54.75 89.5,54.5 ; 96.92,27 98.42,28.5 100.242,28.5 100.25,28.508 100.508,28.508 v1(103.5,31.5) v1(103.5,34.5) v1(103.5,37.5) v1(103.5,40.5) v1(103.5,43.5) v1(103.5,46.5) v1(103.5,49.5) v1(103.5,52.5) ; v1(97.5,31.5) v1(97.5,34.5) 95.5,36.5 95.5,37 96.5,38 96.5,38.5 95.5,39.5 95.5,40 ; v1(97.5,37) 98.5,37 ; v1(97.5,40) 98.5,40 ; v1(97.5,43) 98.5,43 ; v1(97.5,46) 98.5,46 ; v1(97.5,49) 98.5,49 ; v1(97.5,52) 98.5,52 ; v1(98,54.5) 98.5,54.5 ; 99.46,27 100.46,28 101.545,28 102.053,28.508 103.508,28.508 v1(106.5,31.5) v1(106.5,34.5) v1(106.5,37.5) v1(106.5,40.5) v1(106.5,43.5) v1(106.5,46.5) v1(106.5,49.5) ; v1(100.5,31.5) 98.5,33.5 98.5,34 99.5,35 99.5,35.5 98.5,36.5 98.5,37 ; v1(101,52) 101.422,52 v1(103.961,54.539) ; 101,57 99.971,55.971 98.471,55.971 97.5,55 95.5,55 95.5,54.5 ; 102,27 103,28 104.085,28 105.585,29.5 107.282,29.5 107.29,29.508 107.508,29.508 v1(109.5,31.5) v1(109.5,34.5) v1(109.5,37.5) v1(109.5,40.5) v1(109.5,43.5) v1(109.5,46.5) 107.5,48.5 107.5,49 108.5,50 108.5,50.5 v1(106.5,52.5) v1(106.5,55.5) ; 103.54,57 102.003,55.463 98.963,55.463 98.5,55 98.5,54.5 ; 104.54,27 106.04,28.5 107,28.5 107.5,29 108.362,29 108.37,29.008 110.008,29.008 v1(112.5,31.5) v1(112.5,34.5) v1(112.5,37.5) v1(112.5,40.5) v1(112.5,43.5) 110.5,45.5 110.5,46 111.5,47 111.5,47.5 v1(109.5,49.5) v1(109.5,52.5) v1(109.5,55.5) ; 107.08,27 108.58,28.5 110.402,28.5 110.918,29.016 112.516,29.016 115,31.5 v1(115.5,31.5) v1(115.5,34.5) v1(115.5,37.5) v1(115.5,40.5) 113.5,42.5 113.5,43 114.5,44 114.5,44.5 v1(112.5,46.5) v1(112.5,49.5) v1(112.5,52.5) v1(112.5,55.5) ; 109.62,27 111.128,28.508 114.008,28.508 117,31.5 v1(118.5,31.5) v1(118.5,34.5) v1(118.5,37.5) 116.5,39.5 116.5,40 117.5,41 117.5,41.5 v1(115.5,43.5) v1(115.5,46.5) v1(115.5,49.5) v1(115.5,52.5) v1(115.5,55.5) ; 112.16,27 113.16,28 114.245,28 115.253,29.008 118.008,29.008 120.5,31.5 v1(121.5,31.5) v1(121.5,34.5) 119.5,36.5 119.5,37 120.5,38 120.5,38.5 v1(118.5,40.5) v1(118.5,43.5) v1(118.5,46.5) v1(118.5,49.5) v1(118.5,52.5) v1(118.5,55.5) ; 114.7,27 114.7,27.7 115.5,28.5 120,28.5 123,31.5 v1(124.5,31.5) 122.5,33.5 122.5,34 123.5,35 123.5,35.5 v1(121.5,37.5) v1(121.5,40.5) v1(121.5,43.5) v1(121.5,46.5) v1(121.5,49.5) v1(121.5,52.5) v1(121.5,55.5) ; 83.1,55.25 83.1,54.8 84.375,53.525 84.375,52.875 83.5,52 ; 86.35,54.725 87.4,53.675 87.4,52.9 86.5,52 ; 86.5,49 87.5,50 87.5,50.5 86.5,51.5 86.5,52 ; 89.5,46 90.5,47 90.5,47.5 89.5,48.5 89.5,49 ; 89.5,49 90.5,50 90.5,50.5 89.5,51.5 89.5,52 ; 89.5,52 90.5,53 90.5,53.5 89.5,54.5 ; 92.5,43 93.5,44 93.5,44.5 92.5,45.5 92.5,46 ; 92.5,46 93.5,47 93.5,47.5 92.5,48.5 92.5,49 ; 92.5,49 93.5,50 93.5,50.5 92.5,51.5 92.5,52 ; 95.5,40 96.5,41 96.5,41.5 95.5,42.5 95.5,43 ; 95.5,43 96.5,44 96.5,44.5 95.5,45.5 95.5,46 ; 95.5,46 96.5,47 96.5,47.5 95.5,48.5 95.5,49 ; 95.5,49 96.5,50 96.5,50.5 95.5,51.5 95.5,52 ; 95.5,52 96.5,53 96.5,53.5 95.5,54.5 ; 98.5,37 99.5,38 99.5,38.5 98.5,39.5 98.5,40 ; 98.5,40 99.5,41 99.5,41.5 98.5,42.5 98.5,43 ; 98.5,43 99.5,44 99.5,44.5 99,45 98.5,45.5 98.5,46 ; 98.5,46 99.5,47 99.5,47.5 98.5,48.5 98.5,49 ; 98.5,49 99.5,50 99.5,50.5 98.5,51.5 98.5,52 ; 98.5,52 99.5,53 99.5,53.5 98.5,54.5

## Silkscreen, mask and mechanical layers (free items; w line width, h text height)
Mechanical 1:
  lines w0.254: 75.5,25 125.5,25 ccw(c125.5,27.5) 128,27.5 128,56.5 ccw(c125.5,56.5) 125.5,59 75.5,59 ; 77.5,25 27.5,25 cw(c27.5,27.5) 25,27.5 25,56.5 cw(c27.5,56.5) 27.5,59 77.5,59